# Altium PCB MB1296-STM32_LRA_Disco_revC01.PcbDoc (part 2 of 3)
Units mm, origin at the board's own origin, x right, y up, seen from the top; angles counter-clockwise.
Board outline 65.06 x 95.02 mm, 4 copper layers (Top Layer, GND, VCC, Bottom Layer), stack 1.037 mm thick; 180 components, 129 nets, 710 pads, 1005 vias.
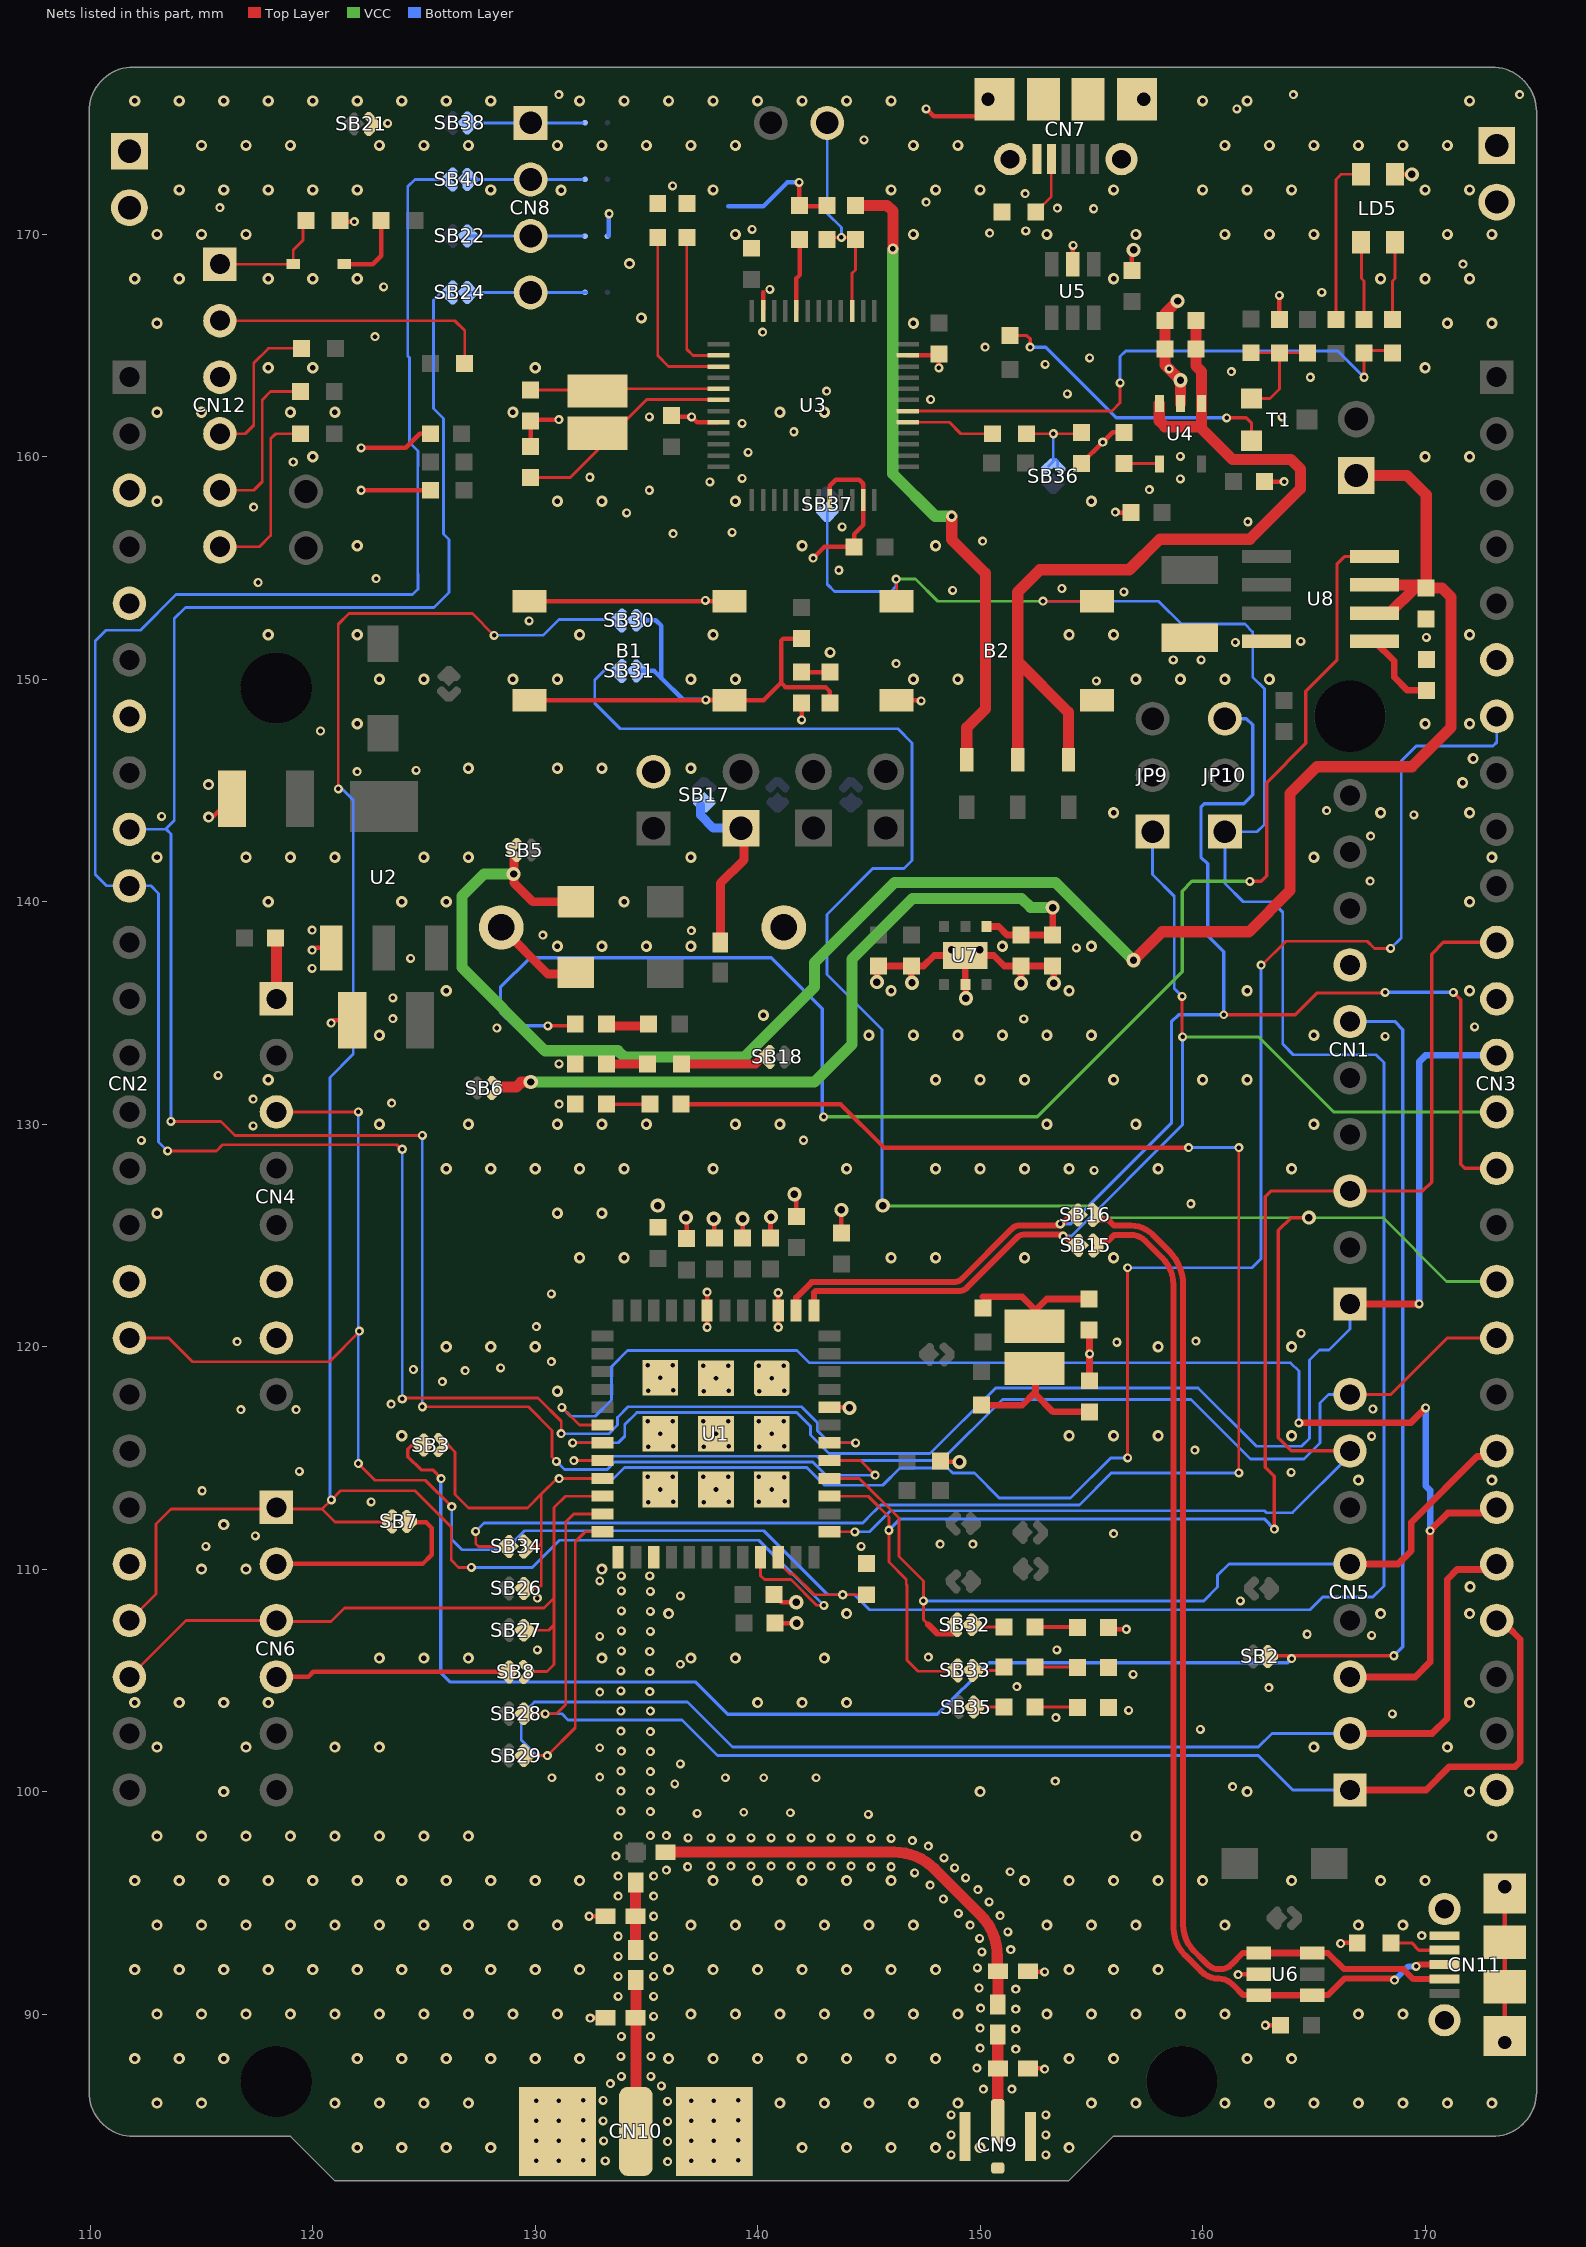
[diagram p4: the nets of this part, all layers, seen from the top]

## Via types
v1: diameter 0.406, hole 0.203, Top Layer to Bottom Layer, tented both sides, 496 vias
v2: diameter 0.5, hole 0.25, Top Layer to Bottom Layer, tented both sides, 413 vias
v3: diameter 0.635, hole 0.33, Top Layer to Bottom Layer, tented both sides, 53 vias
v4: diameter 0.4, hole 0.203, Top Layer to Bottom Layer, tented both sides, 43 vias

## Nets (pads, with @x,y where several pads share a name; then routed paths per layer and width w, separated by ;. In a path a pad name is that pad's centre, name@x,y a point inside that pad or via, vN(x,y) a via of type N, cw(c..) or ccw(c..) an arc to the next point about the centre after c; other vN are vias at no path point) (continued)
GND: B1.1 B1.4 B2.1 B2.4 BT1.2 C1.2 C2.2 C3.1 C4.1 C5.2 C6.2 C7.2 C8.1 C9.1 C10.1 C11.1 C17.1 C18.1 C19.1 C20.1 C21.2 C22.2 C23.2 C24.2 C25.1 C26.1 C27.1 C28.1 C29.1 C30.1 C31.1 C32.1 C33.1 C34.1 C35.1 C36.2 C37.2 C38.1 C39.1 C40.1 CN1.7 CN2.3 CN2.5 CN2.7 CN2.17 CN2.22 CN3.6 CN3.12 CN3.26 CN4.6 CN4.7 CN7.5 CN7.6 CN7.7 CN7.8 CN7.9 CN7.10 CN7.11 CN9.2 CN10.2 CN11.5 CN11.6 CN11.7 CN11.8 CN11.9 CN11.10 CN11.11 CN12.3 CN13.2 JP7.1 JP7.2 JP8.1 JP8.2 L1.1 L2.1 L3.1 L4.1 LD1.K LD2.K LD3.K LD4.K LD5.1 LD7.K R2.1 R6.2 R7.2 R9.1 R14.2 R16.2 R17.1 R18.2 R24.2 R27.1 R32.1 R36.1 SB21.1 SB23.2 U1.3 U1.7 U1.25 U1.27 U1.44 U1.49 U1.50 U1.51 U1.52 U1.53 U1.54 U1.55 U1.56 U1.57 U2.1 U3.8 U3.20 U3.23 U3.35 U3.47 U4.2 U5.2 U6.2 U7.0 U7.2 U8.4 | length 103.3
  Top Layer w0.203: v2@115.425,143.725 116.325,144.625 C37.2@116.376,144.625 ; v1@120.075,137.925 U2.1@120.838,137.925 ; v1@120.95,134.675 C36.2@121.776,134.675 ; R17.1@121.013,170.576 121.014,170.575 v1(121.875,170.575) ; v1(122.174,158.496) R27.1@125.285,158.496 ; v1(122.174,160.401) 124.178,160.401 124.813,161.036 C25.1@125.285,161.036 ; B1.4@129.739,153.508 B1.1@138.739,153.508 ; C22.2@129.794,160.464 C23.2@129.794,161.607 129.857,161.671 v1(131.064,161.671) ; CN10.2@131.725,84.825 CN10.2@131.725,86.44 ; v1@132.425,94.407 L3.1@133.166,94.407 ; v1@132.475,89.832 L4.1@133.166,89.832 ; C27.1@136.144,161.734 136.207,161.798 v1(137.033,161.798) 137.275,161.556 U3.8@138.244,161.556 ; C10.1@136.802,124.855 v3@136.802,125.773 ; v1@137.727,120.898 U1.7@137.727,121.631 v1@137.727,122.448 ; C11.1@138.052,124.88 v3@138.052,125.723 ; C9.1@139.327,124.88 v3@139.327,125.748 ; U3.47@140.244,166.556 140.244,167.405 ; C8.1@140.577,124.88 v3@140.577,125.802 ; C4.1@140.726,108.856 141.071,108.511 v3(141.732,108.511) ; C3.1@140.774,107.575 v3(141.75,107.575) ; v1(140.925,120.875) 140.927,120.877 U1.3@140.927,121.631 v1@140.927,122.423 ; C6.2@141.727,125.73 v3@141.727,126.773 ; v1(141.859,172.339) 141.859,171.26 R14.2@143.129,171.26 ; v1(141.975,148.175) R6.2@141.975,148.926 ; v1(142.494,155.448) 143.002,155.956 144.335,155.956 144.335,156.528 144.744,156.936 U3.23@144.744,158.056 144.744,158.786 144.564,158.966 143.51,158.966 143.244,158.7 U3.20@143.244,158.056 ; U1.44@143.227,117.281 v3@144.125,117.281 ; C5.2@143.76,125.109 v3(143.76,126.15) ; B2.1@146.249,149.063 v1@147.312,149.063 ; U3.35@146.744,164.556 C29.1@147.894,164.556 ; v1(147.574,175.641) 147.914,175.301 149.706,175.301 ; v1@148.15,163.95 C29.1@148.15,164.627 ; R2.1@148.227,114.856 148.258,114.825 v3(149.075,114.825) ; L2.1@152.141,87.557 v1@152.9,87.557 ; L1.1@152.141,91.932 152.141,91.9 v1(152.9,91.9) ; U5.2@154.164,168.651 v1@154.164,169.489 ; C24.2@154.559,159.702 v1(155.511,160.655) 155.956,161.1 C33.1@156.464,161.1 ; LD1.K@155.848,107.3 v1(156.575,107.3) ; v1(156.08,157.51) 156.1,157.49 C34.1@156.781,157.49 ; C35.1@156.825,168.374 v3@156.825,169.225 ; v1@161.544,175.596 v1(161.544,175.641) ; v1@161.625,91.8 U6.2@162.525,91.8 ; C31.1@162.789,158.88 v1(163.66,158.88) ; v1(162.825,89.5) C18.1@163.501,89.5 ; R36.1@163.449,166.179 v1(163.449,167.259) ; v1@166.125,93.225 166.15,93.2 R9.1@166.95,93.2 ; LD5.1@168.644,172.696 v3(169.406,172.696) ; CN11.7@173.575,88.725 CN11.8@173.575,91.225 CN11.9@173.575,93.225 CN11.10@173.575,95.725
  Top Layer w0.3: v3(145.36,136.385) C40.1@145.36,137.037 ; C40.1@145.435,137.112 C38.1@146.91,137.112 ; v3@146.91,136.385 C38.1@146.91,137.112 ; U7.2@149.335,136.285 U7.0@149.335,137.585 ; v3@149.36,135.785 U7.2@149.36,136.26 ; v3(151.835,136.335) C19.1@151.835,137.112 ; C39.1@153.26,137.112 C19.1@151.835,137.112 ; v3(153.31,136.335) C39.1@153.31,137.061 ; C1.2@154.892,120.748 154.917,120.723 C2.2@154.917,118.47 ; C38.1@146.91,137.112 147.461,137.112 147.935,137.585 U7.0@149.335,137.585 ; U7.0@149.335,137.585 150.61,137.585 151.083,137.112 C19.1@151.835,137.112
  Top Layer w0.508: v3(158.877,167.005) 158.305,166.433 C30.1@158.305,166.116 C32.1@158.305,164.846 158.305,164.137 v1(158.496,163.947) v3(159.004,163.439) U4.2@159.004,162.386
  Bottom Layer w0.203: CN10.2@131.731,84.779 CN10.2@131.731,86.394 ; SB23.2@133.299,169.926 v1@133.299,170.764 ; 138.684,171.26 140.26,171.26 141.339,172.339 v1(141.859,172.339) ; CN10.2@138.775,84.779 CN10.2@138.775,86.3
  other v1: 135.95,83.375 130.05,83.4 131.05,83.4 133.15,83.4 137.025,83.4 138.025,83.4 132.15,83.425 139.125,83.425 148.7,83.675 152.95,83.675 135.95,84.275 130.05,84.3 131.05,84.3 133.075,84.3 137.025,84.3 138.025,84.3 132.15,84.325 139.125,84.325 148.7,84.575 152.95,84.575 135.95,85.175 130.05,85.2 131.05,85.2 133.05,85.2 137.025,85.2 138.025,85.2 132.15,85.225 139.125,85.225 148.7,85.475 152.95,85.475 135.95,86.075 130.05,86.1 131.05,86.1 137.025,86.1 138.025,86.1 132.15,86.125 133.05,86.125 139.125,86.125 150.15,86.625 151.425,86.625 135.675,86.775 133.375,86.875 133.875,87.2 135.2,87.2 152.9,87.525 149.85,87.575 133.85,88.1 135.2,88.1 151.6,88.425 150,88.475 133.875,89 135.175,89 151.6,89.325 150,89.375 132.475,89.825 135.325,89.9 151.6,90.225 150.025,90.275 133.725,90.8 135.325,90.8 151.6,91.125 149.95,91.175 133.725,91.7 135.325,91.7 161.6,91.775 149.875,92.075 133.725,92.6 135.325,92.6 150.075,92.8 151.375,92.9 166.2,93.175 149.975,93.4 133.725,93.5 135.325,93.5 169.85,93.525 151.25,93.7 149.55,94 132.425,94.4 135.325,94.4 150.9,94.425 149.025,94.525 150.4,95.05 148.35,95.175 133.725,95.3 135.325,95.3 149.9,95.6 147.75,95.8 149.35,96.125 133.725,96.2 135.325,96.2 147.05,96.35 135.9,96.475 148.85,96.575 136.85,96.625 145.1,96.625 146,96.625 137.9,96.65 138.8,96.65 139.7,96.65 140.6,96.65 141.5,96.65 142.4,96.65 143.3,96.65 144.2,96.65 148.375,97.025 133.625,97.1 147.675,97.55 146.95,97.8 145.1,97.9 146,97.9 136.875,97.925 137.9,97.925 138.8,97.925 139.7,97.925 140.6,97.925 141.5,97.925 142.4,97.925 143.3,97.925 144.2,97.925 133.725,98 135.175,98.025 135.9,98.025 135.175,99.1 133.85,99.125 133.85,100.025 135.175,100.025 161.35,100.225 153.375,100.475 135.175,100.9 133.85,100.925 135.175,101.8 133.875,101.825 135.175,102.7 133.85,102.725 159.9,102.8 153.4,103.325 168.525,103.5 133.85,103.625 135.175,103.625 156.675,103.65 135.15,104.5 133.85,104.525 162.975,104.675 151.65,104.725 156.875,105.275 135.15,105.4 133.85,105.425 147.675,106.05 135.15,106.3 133.875,106.325 130.1,106.375 153.45,106.375 167.6,107.025 164.7,107.075 135.175,107.2 133.875,107.225 135.175,108.1 133.875,108.125 161.7,108.575 135.175,109 133.875,109.025 133.875,109.7 135.15,109.7 115.2,111.025 144.65,111.025 148.2,111.125 149.675,111.125 117.425,111.5 156,111.6 135.075,113 137.575,113 122.625,113.025 136.2,113.025 138.7,113.025 140.05,113.025 141.225,113.05 115.025,113.525 135.627,113.581 138.127,113.581 140.627,113.581 141.2,114.125 135.05,114.15 136.175,114.15 137.55,114.15 138.675,114.15 140.05,114.15 163.975,114.35 119.4,114.4 159.65,115.35 135.075,115.5 137.575,115.5 140.075,115.5 136.2,115.525 138.7,115.525 141.2,115.525 167.6,115.975 135.627,116.081 138.127,116.081 140.627,116.081 135.05,116.65 136.175,116.65 137.55,116.65 138.675,116.65 140.05,116.65 141.175,116.65 116.775,117.175 119.25,117.175 167.65,117.2 123.52,117.42 137.575,118 140.075,118 135.075,118.025 138.7,118.025 141.2,118.025 136.2,118.05 125.83,118.43 138.127,118.581 140.627,118.581 135.627,118.606 126.85,118.92 124.525,118.975 128.45,119.05 137.55,119.15 138.675,119.15 140.05,119.15 141.175,119.15 135.05,119.175 136.175,119.175 130.725,119.325 154.92,119.68 156.15,120.2 116.6,120.225 159.7,120.25 164.425,120.6 137.725,120.875 130.05,120.9 130.725,122.375 140.925,122.425 137.725,122.45 159.475,126.425 155.125,127.925 112.3,129.275 142.06,129.28 117.325,129.925 131.075,130.9 123.55,130.95 117.325,131.125 115.75,132.2 131.07,132.71 168.2,133.95 128.275,134.325 172.225,134.375 120.825,134.55 123.6,134.75 151.96,134.735 123.6,135.675 119.975,137 124.4,137.45 119.975,137.825 154.33,137.93 130.35,138.5 137.025,138.7 119.975,138.725 167.525,140.925 167.55,142.95 113.21,143.84 169.5,143.9 165.575,144.1 122,145.85 124.65,145.9 120.35,147.675 147.35,149.025 155.225,149.925 146.225,150.7 158.68,150.87 159.93,150.87 161.47,151.66 164.41,151.7 170.06,151.88 129.725,152.625 137.65,153.55 156.464,153.924 148.76,154 153.67,154.08 117.55,154.35 122.85,154.525 143.65,154.9 150.114,156.21 136.2,156.55 138.85,156.6 143.8,156.85 162.03,157.08 134.112,157.48 117.348,157.734 135.128,158.496 157.61,158.52 137.851,158.874 159.004,159.004 139.3,159.025 132.46,159.08 119.126,159.766 159.004,160.02 139.575,160.2 141.625,161.125 139.3,161.5 135.128,161.798 163.576,161.798 147.775,162.575 153.925,162.825 143.1,162.95 164.846,163.576 161.29,163.83 148.15,164 152.925,164.15 154.925,164.45 150.225,164.925 122.8,165.4 140.225,165.6 165.354,167.386 140.55,167.525 123.19,167.64 171.704,168.656 154.175,169.5 150.425,170.05 152.05,170.15 139.75,170.225 133.325,170.925 155.1,171.15 153.475,171.175 115.824,171.196 147.574,171.45 152.019,171.831 136.175,172.175 144.78,174.244 123.37,174.99 131.064,176.276 164.084,176.276 174.244,176.276
  other v2: 122,84 124,84 126,84 128,84 142,84 144,84 146,84 148,84 150,84 154,84 113,86 115,86 121,86 123,86 125,86 127,86 141,86 143,86 145,86 147,86 149,86 155,86 157,86 161,86 163,86 165,86 167,86 169,86 171,86 173,86 112,88 114,88 116,88 122,88 124,88 126,88 128,88 130,88 132,88 136,88 138,88 140,88 142,88 144,88 146,88 148,88 154,88 156,88 162,88 164,88 113,90 115,90 117,90 119,90 121,90 123,90 125,90 127,90 129,90 131,90 137,90 139,90 141,90 143,90 145,90 147,90 149,90 153,90 155,90 157,90 159,90 161,90 167,90 169,90 112,92 114,92 116,92 118,92 120,92 122,92 124,92 126,92 128,92 130,92 132,92 136,92 138,92 140,92 142,92 144,92 146,92 148,92 154,92 156,92 158,92 113,94 115,94 117,94 119,94 121,94 123,94 125,94 127,94 129,94 131,94 137,94 139,94 141,94 143,94 145,94 147,94 153,94 155,94 157,94 161,94 167,94 169,94 112,96 114,96 116,96 118,96 120,96 122,96 124,96 126,96 128,96 130,96 132,96 138,96 140,96 142,96 144,96 146,96 152,96 154,96 156,96 158,96 160,96 164,96 168,96 170,96 113,98 115,98 117,98 119,98 121,98 123,98 125,98 127,98 157,98 173,98 116,100 150,100 162,100 172,100 113,102 117,102 121,102 123,102 165,102 171,102 112,104 114,104 116,104 118,104 140,104 142,104 144,104 172,104 123,106 125,106 127,106 133,106 137,106 139,106 143,106 136,108 144,108 168,108 172,108 172.02,109.21 115,110 117,110 133,110 116,112 167,114 173,114 124,116 154,116 156,116 158,116 164,116 131,118 126,120 128,120 130,120 158,120 164,120 132,124 134,124 146,124 148,124 152,124 156,124 113,126 131,126 133,126 126,128 128,128 130,128 132,128 134,128 138,128 144,128 148,128 150,128 152,128 154,128 158,128 164,128 123,130 127,130 131,130 133,130 135,130 139,130 141,130 153,130 157,130 165,130 118,132 148,132 150,132 152,132 156,132 160,132 162,132 123,134 145,134 147,134 149,134 151,134 153,134 155,134 165,134 140.26,134.9 126,136 146,136 154,136 162,136 172,136 131,138 133,138 135,138 137,138 151,138 155,138 118,140 124,140 126,140 134,140 172,140 113,142 117,142 119,142 121,142 125,142 127,142 137,142 165,142 173,142 115.324,143.803 156,144 168,144 172,144 115.316,145.263 171.688,145.35 127,146 131,146 133,146 137,146 172.161,146.431 122,148 170,148 172,148 123,150 125,150 129,150 131,150 137,150 139,150 147,150 149,150 157,150 159,150 161,150 163,150 143.256,151.206 118,152 122,152 132,152 138,152 154,152 156,152 172,152 122,156 142,156 148,156 113,158 131,158 133,158 139,158 155,158 120,160 170,160 172,160 113,162 115,162 119,162 121,162 129,162 141,162 143,162 118,164 120,164 130,164 170,164 113,166 147,166 171,166 173,166 134.772,166.243 112,168 114,168 118,168 120,168 122,168 156,168 168,168 170,168 172,168 134.239,168.681 113,170 115,170 117,170 139,170 147,170 153,170 157,170 161,170 163,170 165,170 171,170 173,170 131.166,171.983 114,172 116,172 118,172 120,172 122,172 128,172 138,172 146,172 148,172 150,172 156,172 160,172 162,172 164,172 170,172 172,172 115,174 117,174 119,174 123,174 125,174 127,174 131,174 133,174 135,174 137,174 139,174 147,174 149,174 161,174 163,174 165,174 167,174 169,174 171,174 112,176 114,176 116,176 118,176 120,176 122,176 124,176 126,176 128,176 132,176 134,176 136,176 138,176 140,176 142,176 144,176 146,176 160,176 162,176 172,176
  other v3: 144.125,117.25 138.025,125.75 139.325,125.75 136.775,125.8 140.6,125.825 135.51,126.34 141.65,126.85 149.36,135.66 146.935,136.36 148.71,137.835 149.985,137.835 156.9,169.3
  other v4: 151.35,96.4 144.975,98.975 137.275,99.025 141.475,99.05 139.375,99.075 136.275,100.35 130.75,100.625 138.55,100.625 140.275,100.625 142.625,100.625 132.9,100.65 136.525,101.25 132.9,101.975 132.9,104.475 136.525,105.725 132.9,106.975 130.1,108.7 136.525,108.8 132.9,109.475
LED_STLINK: R29.2 R30.2 U3.30 | length 25.8
  Top Layer w0.127: U3.30@146.744,162.056 155.919,162.056 156.289,162.426 v1(156.289,163.326) ; v1(167.259,163.576) 167.259,164.782 R29.2@168.529,164.782
  Bottom Layer w0.127: v1(156.289,163.326) 156.289,164.501 156.546,164.758 166.077,164.758 v1(167.259,163.576)
LRA_USB_N: CN11.2 SB16.1 U6.1 U6.6 | length 47.8
  Top Layer w0.27: SB16.1@155.182,125.722 155.733,125.722 156.008,125.446 156.775,125.446 cw(c156.775,124.082) 157.739,125.047 158.493,124.293 cw(c156.967,122.767) 159.125,122.767 159.125,94.014 ccw(c160.789,94.014) 159.612,92.838 ; 159.613,92.838 160.215,92.235 ccw(c160.725,92.744) 160.725,92.024 ; 160.802,92.024 ccw(c160.802,92.698) 161.279,92.221 161.808,92.75 U6.1@162.525,92.75 ; U6.6@164.925,92.75 165.633,92.75 166.36,92.024 169.026,92.024 169.475,91.575 CN11.2@170.875,91.575
  Top Layer w0.3: U6.1@162.525,92.75 U6.6@164.925,92.75
LRA_USB_P: CN11.3 SB15.1 U6.3 U6.4 | length 48
  Top Layer w0.27: SB15.1@155.207,124.753 155.758,124.753 156.033,125.029 156.775,125.029 cw(c156.775,124.133) 157.408,124.767 ; 157.408,124.767 158.188,123.987 cw(c156.967,122.767) 158.693,122.767 158.693,93.878 ccw(c160.409,93.878) 159.195,92.666 ; 159.196,92.665 159.937,91.923 ccw(c160.738,92.724) 160.738,91.592 cw(c160.738,90.738) 161.342,91.342 161.833,90.85 U6.3@162.525,90.85 ; U6.4@164.925,90.85 165.633,90.85 166.375,91.592 v1@168.625,91.592 ; v1(169.6,92.15) 169.675,92.225 CN11.3@170.875,92.225
  Top Layer w0.3: U6.3@162.525,90.85 U6.4@164.925,90.85
  Bottom Layer w0.27: v1(168.625,91.525) 169.25,92.15 v1(169.6,92.15)
MCU_NRST: B2.2 B2.3 C17.2 CN2.18 CN4.3 JP10.1 SB37.2 U1.34 | length 164.5
  Top Layer w0.127: CN2.18@111.76,120.396 113.529,120.396 114.6,119.325 120.75,119.325 v1@122.125,120.7 ; CN4.3@118.364,130.556 122.044,130.556 v1(122.05,130.55) ; v1@122,114.8 v1(122.05,114.75) 122.8,114 125.06,114 v1(126.25,112.81) ; U1.34@140.927,110.312 141.454,109.785 141.607,109.785 142.542,108.85 v1(143.825,108.85) C17.2@144.899,108.85 ; B2.2@146.249,153.508 v1@146.249,154.476 ; v1(152.825,153.508) B2.3@155.249,153.508 ; B2.3@155.066,153.325 B2.3@155.227,153.486
  VCC w0.127: v1(146.225,154.5) 147.1,154.5 148.092,153.508 v1(152.825,153.508)
  Bottom Layer w0.127: v1(122.05,114.75) v1(122.05,130.55) ; v1(126.25,112.81) 126.25,111.34 126.715,110.875 128.675,110.875 129.525,111.725 140.275,111.725 143.15,108.85 v1(143.825,108.85) 144.35,108.85 145.025,108.175 164.825,108.175 165.4,108.75 167.65,108.75 168.15,109.25 168.15,132.775 167.8,133.125 164.075,133.125 163.6,133.6 163.6,139.525 163.125,140 161.825,140 161,140.825 JP10.1@161,143.15 162.455,143.15 162.775,143.47 162.775,149.575 162.25,150.1 162.25,152.13 161.9,152.48 159.05,152.48 158.022,153.508 v1(152.825,153.508) ; SB37.2@143.129,157.531 143.129,154.271 143.45,153.95 145.991,153.95 146.225,154.184 v1(146.225,154.5)
  other v1: 122.1,120.7
NetB1_2: B1.2 B1.3 C16.2 R5.1 SB30.2 SB31.2 | length 25.7
  Top Layer w0.203: B1.3@129.739,149.063 B1.2@138.739,149.063 ; v1(137.675,149.075) 138.727,149.075 B1.2@138.739,149.063 ; R5.1@141.975,151.827 141.152,151.827 141.05,151.725 141.05,149.85 ; C16.2@143.25,148.926 143.25,149.45 143.05,149.65 141.25,149.65 141.05,149.85 ; B1.2@138.739,149.063 140.263,149.063 141.05,149.85
  Bottom Layer w0.203: SB31.2@134.555,150.375 135.35,150.375 135.675,150.05 ; SB30.2@134.555,152.65 135.425,152.65 135.675,152.4 135.675,150.05 ; v1(137.675,149.075) 136.65,149.075 135.675,150.05
NetBT1_1: BT1.1 D5.1 | length 4.2
  Top Layer w0.4: BT1.1@128.475,138.85 130.575,136.75 D5.1@131.825,136.75
NetC1_1: C1.1 R4.1 X1.1 | length 6.2
  Top Layer w0.3: 150.117,122.246 151.884,122.246 X1.1@152.49,121.64 ; X1.1@152.49,120.69 X1.1@152.49,121.64 ; C1.1@154.892,122.145 152.995,122.145 X1.1@152.49,121.64
NetC2_1: C2.1 R3.1 X1.2 | length 6.6
  Top Layer w0.3: R3.1@150.07,117.37 151.895,117.37 152.49,117.965 ; X1.2@152.45,119.02 152.49,118.98 152.49,117.965 ; C2.1@154.917,117.073 153.282,117.073 152.49,117.865 152.49,117.965
NetC12_1: C12.1 C13.1 L1.2 | length 19.6
  Top Layer w0.5: C13.1@135.866,97.282 146.139,97.282 cw(c146.139,94.742) 147.935,96.538 150.022,94.451 cw(c148.226,92.655) 150.766,92.655 ; C12.1@150.795,90.562 L1.2@150.795,91.932
  Top Layer w0.508: C12.1@150.741,90.432 ccw(c150.611,90.562) C12.1@150.795,90.562 ; L1.2@150.766,91.832 150.766,92.655
NetC12_2: C12.2 CN9.1 L2.2 | length 3.1
  Top Layer w0.5: CN9.1@150.791,86.007 C12.2@150.791,89.086
NetC14_2: C14.2 C15.1 L3.2 | length 4
  Top Layer w0.5: 134.516,93.475 L3.2@134.516,94.407
  Top Layer w0.508: C14.2@134.512,95.911 L3.2@134.512,94.407 134.512,92.882 C15.1@134.516,92.882
NetC15_2: C15.2 CN10.1 L4.2 | length 6.8
  Top Layer w0.5: CN10.1@134.525,84.875 C15.2@134.525,91.632
  Top Layer w0.508: C15.2@134.516,91.536 C15.2@134.525,91.536
NetC16_1: C16.1 R6.1 | length 1.3
  Top Layer w0.203: R6.1@141.975,150.323 C16.1@143.25,150.323
NetC19_2: C19.2 C39.2 SB6.1 U7.4 | length 35.2
  Top Layer w0.3: U7.4@150.285,138.885 150.835,138.885 151.212,138.509 C19.2@151.835,138.509 C39.2@153.26,138.509 v3(153.26,139.735)
  Top Layer w0.5: SB6.1@128.345,131.675 129.15,131.675 129.375,131.9 v3(129.8,131.9)
  VCC w0.5: v3(129.8,131.9) 142.56,131.9 144.24,133.58 144.24,137.42 146.97,140.15 151.86,140.15 152.275,139.735 v3(153.26,139.735)
NetC20_2: C20.2 D7.1 JP5.1 SB5.1 U8.6 U8.7 | length 87.4
  Top Layer w0.4: SB5.1@129.043,142.122 129.043,140.857 129.9,140 D7.1@131.825,140
  Top Layer w0.5: v3(156.89,137.37) 158.17,138.65 162.075,138.65 163.925,140.5 163.925,144.86 165.135,146.07 169.41,146.07 171.17,147.83 171.17,153.7 170.761,154.109 C20.2@170.05,154.109 ; JP5.1@167.005,159.156 169.189,159.156 170.05,158.296 C20.2@170.05,154.109 ; U8.7@167.725,154.245 169.914,154.245 C20.2@170.05,154.109 ; U8.6@168.408,152.975 169.542,154.109
  VCC w0.5: v3(129.03,141.25) 127.71,141.25 126.71,140.25 126.71,137.04 130.45,133.3 133.73,133.3 134.01,133.02 139.41,133.02 142.552,136.162 142.552,137.262 146.155,140.865 153.395,140.865 v3(156.89,137.37)
NetC24_1: C24.1 R25.1 SB36.1 | length 4.3
  Top Layer w0.127: R25.1@152.082,161.036 v1(153.289,161.036) C24.1@154.495,161.036
  Bottom Layer w0.127: SB36.1@153.086,159.588 153.289,159.791 v1(153.289,161.036) ; SB36.1@153.387,159.89 153.492,159.785 SB36.1@153.492,159.588
NetC30_2: C30.2 C32.2 D3.2 D8.2 U4.1 U4.3 | length 41.3
  Top Layer w0.508: D8.2@151.689,146.387 151.689,150.8 ; D3.2@153.975,146.387 153.975,148.514 151.689,150.8 ; U4.3@158.054,162.386 158.054,161.605 158.303,161.356 159.954,161.356 ; C30.2@159.702,166.116 C32.2@159.702,164.846 159.702,164.084 159.954,163.832 U4.1@159.954,162.386 159.954,161.356 ; 151.689,150.8 151.689,153.924 152.685,154.92 156.7,154.92 158.08,156.3 162.13,156.3 164.4,158.57 164.4,159.45 163.975,159.875 161.35,159.875 159.954,161.271 159.954,161.356
NetC33_2: C33.2 U4.4 | length 1.6
  Top Layer w0.127: C33.2@156.464,159.702 U4.4@158.037,159.702
NetCN4_1: CN4.1 R15.2 | length 2.7
  Top Layer w0.5: CN4.1@118.364,135.636 R15.2@118.364,138.334
NetCN7_4: CN7.4 R32.2 | length 2.7
  Top Layer w0.127: R32.2@152.499,171 153.2,171.701 CN7.4@153.2,173.375
NetCN8_1: CN8.1 SB38.2 SB39.1 | length 4.9
  Bottom Layer w0.127: SB38.2@127.254,175.006 CN8.1@129.794,175.006 132.112,175.006
NetCN8_2: CN8.2 SB40.2 SB41.1 | length 5.2
  Bottom Layer w0.127: SB40.2@126.949,172.466 CN8.2@129.794,172.466 132.112,172.466
NetCN8_3: CN8.3 SB22.2 SB23.1 | length 5.2
  Bottom Layer w0.127: SB22.2@126.949,169.926 CN8.3@129.794,169.926 132.112,169.926
NetCN8_4: CN8.4 SB24.2 SB25.1 | length 5.4
  Bottom Layer w0.127: SB24.2@126.949,167.386 CN8.4@129.794,167.386 SB25.1@132.309,167.386
NetCN11_4: CN11.4 R9.2 | length 2.5
  Top Layer w0.15: R9.2@168.474,93.2 169.4,93.2 169.725,92.875 CN11.4@170.875,92.875
NetCN12_1: CN12.1 D1.1 R17.2 | length 5.3
  Top Layer w0.127: CN12.1@115.824,168.656 D1.1@118.999,168.656 ; D1.1@119.126,168.656 119.126,169.291 119.57,169.736 R17.2@119.57,170.561
NetCN12_2: CN12.2 R20.2 | length 12.7
  Top Layer w0.127: CN12.2@115.824,166.116 126.384,166.116 126.838,165.662 R20.2@126.838,164.201
NetCN12_4: CN12.4 R21.2 | length 6.9
  Top Layer w0.127: CN12.4@115.824,161.036 116.967,161.036 117.348,161.417 117.348,164.211 117.983,164.846 ; 118.012,164.875 R21.2@119.501,164.875
NetCN12_5: CN12.5 R22.2 | length 7.6
  Top Layer w0.127: CN12.5@115.824,158.496 117.348,158.496 117.729,158.877 117.729,162.56 118.11,162.941 R22.2@119.444,162.941
NetCN12_6: CN12.6 R23.2 | length 8.3
  Top Layer w0.127: CN12.6@115.824,155.956 117.602,155.956 118.11,156.464 118.11,160.81 118.336,161.036 R23.2@119.444,161.036
NetD1_2: D1.2 R19.2 | length 3.4
  Top Layer w0.203: D1.2@121.412,168.656 122.7,168.656 123.077,169.032 R19.2@123.077,170.6
NetD2_2: D2.2 R13.1 | length 28.9
  Top Layer w0.5: R13.1@144.4,171.3 145.819,171.3 146.075,171.044 v2(146.075,169.342)
  Top Layer w0.508: v2(148.717,157.328) 148.717,156.286 150.241,154.762 150.241,148.666 149.403,147.828 D2.2@149.403,146.387
  VCC w0.508: v2(146.075,169.342) 146.075,159.233 147.98,157.328 v2(148.717,157.328)
NetJP1_1: JP1.1 L5.1 SB17.2 | length 8.1
  Top Layer w0.4: L5.1@138.325,138.175 138.325,140.825 139.392,141.892 JP1.1@139.392,143.307
  Bottom Layer w0.4: SB17.2@137.422,144.343 137.422,143.901 138.013,143.31 JP1.1@139.22,143.31
NetJP4_2: JP4.2 R13.2 R14.1 U3.39 | length 10
  Top Layer w0.127: R14.1@143.129,169.862 v1(143.764,169.862) 144.399,169.862 144.399,168.402 144.244,168.247 U3.39@144.244,166.556
  Bottom Layer w0.127: JP4.2@143.129,175.006 143.129,170.942 143.764,170.307 v1(143.764,169.862)
NetLD1_A: LD1.A R11.2 | length 2
  Top Layer w0.127: R11.2@152.473,107.3 R11.2@152.599,107.3
  Top Layer w0.2: R11.2@152.599,107.4 154.351,107.4 LD1.A@154.451,107.3
NetLD2_A: LD2.A R8.2 | length 2
  Top Layer w0.15: LD2.A@133.198,130.9 R8.2@135.152,130.9
NetLD3_A: LD3.A R10.2 | length 1.7
  Top Layer w0.127: R10.2@152.599,105.6 LD3.A@154.301,105.6
NetLD4_A: LD4.A R12.2 | length 1.9
  Top Layer w0.127: R12.2@152.599,103.8 LD4.A@154.501,103.8
NetLD5_2: LD5.2 R29.1 | length 3.6
  Top Layer w0.127: R29.1@168.529,166.179 168.529,167.894 168.644,168.009 LD5.2@168.644,169.696
NetLD5_3: LD5.3 R30.1 | length 3.6
  Top Layer w0.127: LD5.3@167.144,169.696 167.144,168.009 167.259,167.894 R30.1@167.259,166.179
NetLD5_4: LD5.4 R31.1 | length 7.5
  Top Layer w0.127: R31.1@165.989,166.179 165.989,172.466 166.219,172.696 LD5.4@167.144,172.696
NetLD6_A: LD6.A R39.1 | length 1.7
  Top Layer w0.4: LD6.A@133.313,134.415 R39.1@135.062,134.415
NetLD6_K: LD6.K U8.8 | length 69.3
  Top Layer w0.15: v4(130.57,134.42) LD6.K@131.911,134.42 ; v1(162.128,140.919) 162.636,140.919 162.88,141.163 162.88,145.355 164.64,147.115 164.64,149.46 166.04,150.86 166.04,155.18 166.375,155.515 U8.8@167.725,155.515
  VCC w0.15: v4(142.96,130.33) 152.56,130.33 159.08,136.85 159.08,140.48 159.519,140.919 v1(162.128,140.919)
  Bottom Layer w0.15: v4(130.57,134.42) 129.06,134.42 128.44,135.04 128.44,136.16 129.77,137.49 140.61,137.49 142.9,135.2 v4@142.9,130.39
NetLD7_A: LD7.A R37.1 | length 1.7
  Top Layer w0.4: LD7.A@133.318,132.71 R37.1@135.055,132.71
NetR7_1: R7.1 U3.2 | length 6.6
  Top Layer w0.127: R7.1@136.814,169.853 136.814,164.836 137.094,164.556 U3.2@138.244,164.556
NetR8_1: R8.1 SB34.2 | length 78
  Top Layer w0.127: v1(127.325,111.7) 127.325,111.15 127.455,111.02 SB34.2@128.82,111.02 ; v1(161.625,114.325) v1(161.625,128.95)
  Top Layer w0.2: R8.1@136.549,130.9 143.725,130.9 145.675,128.95 v1(159.375,128.95)
  Bottom Layer w0.127: v1(127.325,111.7) 127.7,112.075 144.725,112.075 144.915,112.264 144.915,112.275 145.53,112.89 154.458,112.89 155.893,114.325 v1(161.625,114.325) ; v1(159.375,128.95) v1(161.625,128.95)
NetR10_1: R10.1 SB33.2 | length 1.8
  Top Layer w0.127: SB33.2@149.535,105.125 SB33.2@149.78,105.125 ; SB33.2@149.655,105.45 150.927,105.45 R10.1@151.076,105.6 ; SB33.2@149.78,105.275 SB33.2@149.805,105.25
NetR11_1: R11.1 SB32.2 | length 1.6
  Top Layer w0.127: SB32.2@149.63,107.5 149.73,107.4 R11.1@151.202,107.4
NetR12_1: R12.1 SB35.2 | length 1.4
  Top Layer w0.127: SB35.2@149.705,103.8 R12.1@151.076,103.8
NetR16_1: R16.1 U3.44 | length 3.4
  Top Layer w0.2: U3.44@141.744,166.556 141.744,168.019 141.9,168.175 141.9,169.817 R16.1@141.864,169.853
NetR18_1: R18.1 U3.3 | length 8.3
  Top Layer w0.127: R18.1@135.509,169.862 135.509,164.547 136,164.056 U3.3@138.244,164.056
NetR24_1: R24.1 U8.5 | length 3.7
  Top Layer w0.3: U8.5@167.725,151.705 168.62,150.81 168.62,150.09 169.209,149.501 R24.1@170.12,149.501
NetR25_2: R25.2 U3.29 | length 4.2
  Top Layer w0.127: U3.29@146.744,161.556 148.609,161.556 149.129,161.036 R25.2@150.685,161.036
NetR33_1: R33.1 T1.2 | length 13.5
  Top Layer w0.15: R33.1@151.339,165.451 152.099,165.451 152.25,165.3 v1(152.25,164.925) ; v1(161.075,161.75) 161.95,161.75 162.199,161.501 T1.2@162.199,160.721
  Bottom Layer w0.15: v1(152.25,164.925) 152.95,164.925 156.125,161.75 v1(161.075,161.75)
NetR34_2: R34.2 R35.2 R36.2 T1.1 | length 5.6
  Top Layer w0.127: R35.2@162.175,164.676 164.698,164.676 R34.2@164.719,164.655 ; T1.1@162.199,162.621 163.03,162.621 163.449,163.04 R36.2@163.449,164.655
NetR37_2: R37.2 SB18.1 | length 4
  Top Layer w0.4: R37.2@136.584,132.715 139.905,132.715 SB18.1@140.418,133.228
OSC_IN: C23.1 U3.5 X2.2 | length 8.5
  Top Layer w0.127: C23.1@129.794,163.005 132.766,163.005 X2.2@132.81,162.96 132.906,163.056 U3.5@138.244,163.056
OSC_OUT: C22.1 U3.6 X2.1 | length 10.4
  Top Layer w0.127: C22.1@129.794,159.067 130.561,159.067 130.818,159.067 131.577,159.067 132.81,160.3 X2.1@132.81,161.06 ; X2.1@132.974,160.533 135.014,162.573 138.227,162.573 U3.6@138.244,162.556
PA0: CN2.23 CN6.1 SB7.1 SB30.1 U1.33 | length 100.6
  Top Layer w0.127: CN2.23@111.76,107.696 112.95,108.886 112.95,112.025 113.625,112.7 CN6.1@118.201,112.7 ; CN6.1@118.364,112.7 120.425,112.7 ; v1(121.15,145.075) 121.15,152.475 121.625,152.95 127.175,152.95 v1(128.15,151.975) ; SB7.1@123.443,112.353 123.215,112.125 121,112.125 120.425,112.7 ; v1(127.13,110.08) 126.56,110.08 126.23,110.41 126.23,111.895 124.6,113.525 121.25,113.525 v1(120.838,113.113) 120.425,112.7 ; U1.33@140.127,110.531 140.127,109.706 140.302,109.531 141.502,109.531 142.658,108.375 v1(142.975,108.375)
  Bottom Layer w0.127: v1@120.775,113.175 120.775,132.1 121.825,133.15 121.825,144.575 121.325,145.075 v1(121.15,145.075) ; v1(127.13,110.08) 129.87,110.08 131.09,111.3 140.05,111.3 v1(142.975,108.375) ; v1(128.15,151.975) 130.35,151.975 131.065,152.69 133.525,152.69 SB30.1@133.768,152.447
"PA0 ALIAS": CN6.2 SB7.2 | length 9.5
  Top Layer w0.2: CN6.2@118.364,110.236 124.936,110.236 125.35,110.65 125.35,111.85 125.1,112.1 SB7.2@124.28,112.1
PA2: CN3.22 CN5.2 SB29.2 U1.24 | length 66.6
  Top Layer w0.127: SB29.2@129.487,101.622 v1(130.547,101.622) 131.8,102.875 131.8,111.231 132.25,111.681 U1.24@133.027,111.681
  Top Layer w0.3: CN5.2@166.624,102.616 170.316,102.616 171,103.3 171,109.55 171.435,109.985 CN3.22@172.725,109.985
  Bottom Layer w0.127: v1(130.547,101.622) 130.078,101.622 129.375,102.325 129.375,103.439 129.961,104.025 136.85,104.025 138.875,102 162.5,102 163.116,102.616 CN5.2@166.624,102.616
PA3: CN3.23 CN5.1 SB28.2 U1.23 | length 65.1
  Top Layer w0.127: SB28.2@129.487,103.5 v1(130.45,103.5) 130.95,103.5 131.375,103.925 131.375,112.125 131.731,112.481 U1.23@133.027,112.481
  Top Layer w0.3: CN5.1@166.624,100.076 170.051,100.076 171.1,101.125 174.05,101.125 174.275,101.35 174.275,106.85 173.68,107.445 CN3.23@172.725,107.445
  Bottom Layer w0.127: v1(130.45,103.5) 131.2,103.5 131.475,103.225 136.6,103.225 138.2,101.625 162.5,101.625 164.049,100.076 CN5.1@166.624,100.076
PA4: CN2.24 CN6.3 SB8.1 SB27.2 U1.22 | length 33
  Top Layer w0.127: CN2.24@111.76,105.156 114.3,107.696 CN6.3@118.364,107.696 118.406,107.654 120.829,107.654 121.425,108.25 130.4,108.25 130.85,108.7 ; SB27.2@129.487,107.257 130.607,107.257 130.85,107.5 ; SB8.1@129.607,105.588 129.8,105.395 130.525,105.395 130.85,105.72 130.85,107.5 ; U1.22@133.027,113.281 131.356,113.281 130.85,112.775 130.85,108.7 ; 130.85,107.5 130.85,108.7
"PA4 ALIAS": CN6.4 SB8.2 | length 10.6
  Top Layer w0.127: SB8.2@128.693,105.385 SB8.2@128.82,105.385
  Top Layer w0.2: CN6.4@118.364,105.156 119.8,105.156 120.029,105.385 128.515,105.385 SB8.2@128.693,105.563
PA5: CN3.7 SB3.1 SB26.2 SB34.1 U1.21 | length 92.5
  Top Layer w0.127: SB3.1@125.97,115.57 126.1,115.57 126.4,115.27 126.4,113.36 127.01,112.75 129.65,112.75 130.275,113.375 ; SB34.1@129.607,111.223 SB34.1@129.607,110.817 129.816,111.025 130.15,111.025 130.275,111.15 ; SB26.2@129.614,109.313 129.777,109.15 130.15,109.15 130.275,109.275 130.275,111.15 ; U1.21@133.027,114.081 130.981,114.081 130.275,113.375 ; v4(156.625,115) v4(156.625,123.55) ; v4(162.625,137.15) 162.675,137.15 163.75,138.225 167.4,138.225 167.725,137.9 v4(168.45,137.9) ; 130.275,111.15 130.275,113.375
  Bottom Layer w0.127: v4(131.075,114.075) 133.525,114.075 134.017,114.567 142.208,114.567 143,113.775 145.622,113.775 146.397,114.55 148.533,114.55 148.766,114.317 149.743,114.317 150.862,113.198 154.068,113.198 155.87,115 v4(156.625,115) ; v4(156.625,123.55) 162.225,123.55 162.625,123.95 v4(162.625,137.15) ; v4(168.45,137.9) 168.925,138.375 168.925,146.325 169.6,147 173.05,147 173.22,147.17 CN3.7@173.22,148.336
PA5/PB13: CN1.6 SB2.2 SB3.2 | length 88.4
  Top Layer w0.15: SB3.2@124.99,115.58 124.46,115.58 124.27,115.39 124.27,115.06 124.87,114.46 125.39,114.46 v1(125.775,114.075) ; SB2.2@162.93,106.075 162.963,106.108 v1(168.592,106.108) v1@168.625,106.075
  Bottom Layer w0.15: v1(125.775,114.075) 125.75,114.05 125.75,105.35 126.17,104.93 137.195,104.93 138.65,103.475 148.075,103.475 150.4,105.8 163.825,105.8 v1(164,105.975) ; CN1.6@166.624,134.62 168.63,134.62 169,134.25 169,106.516 v1(168.592,106.108)
PA8: CN3.18 CN5.8 U1.20 | length 47.8
  Top Layer w0.127: v1(131.744,114.881) U1.20@133.027,114.881 ; CN5.8@166.85,117.856 168.456,117.856 170.996,120.396 CN3.18@172.725,120.396
  Bottom Layer w0.127: v1(131.744,114.881) 132.65,114.881 132.844,115.075 142.675,115.075 142.869,114.881 148.252,114.881 151.001,117.63 159.47,117.63 162.15,114.95 164.55,114.95 165.275,115.675 165.275,117.475 165.656,117.856 CN5.8@166.624,117.856
PA9: CN1.1 CN3.13 U1.19 | length 62.9
  Top Layer w0.127: v1(131.681,115.681) U1.19@133.027,115.681
  Top Layer w0.3: CN1.1@166.624,121.92 v4(169.73,121.92)
  Bottom Layer w0.127: v1(131.681,115.681) 133.731,115.681 134.025,115.975 134.025,116.5 134.569,117.044 141.756,117.044 142.375,116.425 142.375,116.025 143.2,115.2 147.75,115.2 150.7,118.15 159.8,118.15 162.425,115.525 164.45,115.525 164.8,115.875 164.8,119.4 165.25,119.85 165.675,119.85 166.624,120.799 CN1.1@166.624,121.92
  Bottom Layer w0.3: v4(169.73,121.92) 169.73,132.805 170.021,133.096 CN3.13@172.725,133.096
PA10: CN3.21 CN5.3 U1.18 | length 64.4
  Top Layer w0.127: v1(131.2,117.275) 131.994,116.481 U1.18@133.027,116.481
  Top Layer w0.3: v1@164.362,116.575 169.35,116.575 v4(170.025,117.25) ; CN5.3@166.624,105.156 169.556,105.156 170.225,105.825 v4(170.225,111.725) 171.025,112.525 CN3.21@172.725,112.525
  Bottom Layer w0.127: v1(131.2,117.275) 131.6,116.875 132.7,116.875 133.425,117.6 133.425,119.1 134.15,119.825 141.775,119.825 142.325,119.275 163.95,119.275 164.325,118.9 v1@164.325,116.612
  Bottom Layer w0.3: v4(170.025,117.25) 170.025,113.75 170.225,113.55 v4(170.225,111.725)
  other v1: 164.325,116.575
PA11: CN3.15 JP10.3 SB16.2 U1.2 | length 65.2
  Top Layer w0.15: v4@160.975,134.92 164.17,134.92 165.15,135.9 168.175,135.9 v1(168.2,135.925) ; v1(171.275,135.925) 171.6,135.6 171.6,128.2 171.784,128.016 CN3.15@172.725,128.016
  Top Layer w0.27: U1.2@141.727,121.631 141.727,122.202 142.425,122.9 148.8,122.9 ccw(c148.8,123.443) 149.184,123.059 151.425,125.3 ; 151.425,125.3 cw(c151.787,124.938) 151.787,125.45 v1@153.625,125.45 ; v1@153.65,125.475 154.1,125.925 SB16.2@154.395,125.925
  Bottom Layer w0.15: v1(153.6,125.525) 154.075,125.525 158.6,130.05 158.6,134.6 158.92,134.92 v4(160.95,134.92) 160.95,137.75 160.225,138.475 160.225,141.708 159.925,142.008 159.925,144.25 160.075,144.4 161.85,144.4 162.25,144.8 162.25,147.95 161.97,148.23 JP10.3@161,148.23 ; v1(168.2,135.925) v1(171.275,135.925)
PA12: CN3.14 JP9.1 SB15.2 U1.1 | length 49.9
  Top Layer w0.127: v1(159.075,135.75) 159.075,133.95 v1(159.1,133.925)
  Top Layer w0.27: U1.1@142.527,121.631 142.527,122.43 142.6,122.503 149.045,122.503 ccw(c149.045,123.005) 149.4,122.65 151.646,124.896 ; 151.646,124.896 cw(c152.025,124.517) 152.025,125.053 153.736,125.053 154.093,124.697 SB15.2@154.262,124.697
  VCC w0.127: v1(159.1,133.925) 162.525,133.925 165.894,130.556 CN3.14@172.725,130.556
  Bottom Layer w0.127: v1(153.725,124.975) 154.1,124.975 159.1,129.975 v1(159.1,133.925) ; JP9.1@157.75,143.15 157.75,141.225 158.725,140.25 158.725,136.1 v1(159.075,135.75)
PA13: CN2.9 SB24.1 U1.41 | length 100
  Top Layer w0.127: v1(113.625,130.125) 115.875,130.125 116.5,129.5 v1@124.875,129.5 ; v1(124.925,117.3) 129.7,117.3 130.76,116.24 130.76,115.04 v1(130.95,114.85) ; U1.41@143.227,114.881 144.619,114.881 v1(145.275,114.225)
  Bottom Layer w0.127: CN2.9@111.76,143.256 113.381,143.256 113.775,143.65 113.775,152.725 114.275,153.225 125.45,153.225 126.125,153.9 126.125,156.275 125.875,156.525 125.875,161.725 125.425,162.175 125.425,167.049 125.762,167.386 SB24.1@125.959,167.386 ; 113.419,143.256 113.625,143.05 v1(113.625,130.125) ; v1@124.925,117.4 v1(124.925,129.5) ; v1(130.95,114.85) 131.313,114.487 133.237,114.487 133.571,114.821 142.479,114.821 143.075,114.225 v1(145.275,114.225)
PA14: CN2.10 SB40.1 U1.42 | length 107.1
  Top Layer w0.127: v1(113.475,128.8) 115.675,128.8 115.95,129.075 123.775,129.075 v1@123.975,128.875 ; v1(124.025,117.65) 124.069,117.694 130.126,117.694 131.17,116.65 v1(131.17,116.09) ; U1.42@143.227,115.681 v1(144.4,115.681)
  Bottom Layer w0.127: v1(113.475,128.8) 113.075,129.2 113.075,140.375 112.734,140.716 CN2.10@111.76,140.716 110.734,140.716 110.225,141.225 110.225,151.725 110.7,152.2 112.25,152.2 113.862,153.812 124.489,153.812 124.727,154.05 124.727,154.722 124.723,154.725 124.723,159.597 124.727,159.6 124.727,160.261 124.35,160.638 124.35,164.45 124.275,164.525 124.275,172.15 124.591,172.466 SB40.1@125.959,172.466 ; v1(124.025,117.65) v1(124.025,128.875) ; v1@131.17,116.087 133.312,116.087 133.7,116.475 133.7,116.825 134.173,117.298 141.977,117.298 142.675,116.6 142.675,116.233 143.227,115.681 v1(144.4,115.681)
PB2: CN3.17 CN5.7 SB31.1 U1.37 | length 109.7
  Top Layer w0.127: U1.37@143.227,111.681 v1(144.369,111.681)
  Top Layer w0.15: v3(164.775,125.8) 163.975,125.8 163.4,125.225 163.4,115.9 163.984,115.316 CN5.7@166.624,115.316
  VCC w0.127: v3@145.62,126.325 154.925,126.325 155.45,125.8 v3(164.775,125.8) 168.1,125.8 170.964,122.936 CN3.17@172.725,122.936
  Bottom Layer w0.127: SB31.1@133.768,150.172 133.515,150.425 133.131,150.425 132.675,149.969 132.675,148.925 133.825,147.775 146.306,147.775 146.939,147.142 146.939,141.859 146.57,141.49 145.17,141.49 143.11,139.43 143.11,136.73 145.59,134.25 v3@145.59,126.34 ; v1(144.369,111.681) 145.031,111.681 145.98,112.63 162.771,112.63 162.86,112.54 164.04,112.54 166.624,115.124 CN5.7@166.624,115.316
  other v3: 145.62,126.34
PB5: CN3.20 CN5.5 SB32.1 U1.40 | length 39.5
  Top Layer w0.127: U1.40@143.227,114.081 144.569,114.081 146.356,112.294 146.356,110.569 147.45,109.475 v1(147.45,108.575) 147.45,107.725 147.672,107.503
  Top Layer w0.3: 147.672,107.503 148.056,107.119 SB32.1@148.764,107.119 ; CN5.5@166.624,110.236 168.786,110.236 169.375,110.825 169.375,112.1 172.34,115.065 CN3.20@172.725,115.065
  Bottom Layer w0.127: v1(147.45,108.575) 160.05,108.575 160.675,109.2 160.675,109.725 161.186,110.236 CN5.5@166.624,110.236
PB6: CN1.3 CN3.11 SB33.1 U1.39 | length 65.7
  Top Layer w0.127: U1.39@143.227,113.281 144.969,113.281 145.9,112.35 v1(145.9,111.75) 145.9,110.325 146.675,109.55 146.675,109.316 146.716,109.275 146.716,105.909 147.213,105.412 148.702,105.412 SB33.1@148.868,105.247
  Top Layer w0.15: v1(163.225,111.8) 163.225,114.175 162.82,114.58 162.82,126.745 163.075,127 CN1.3@166.624,127 169.9,127 170.3,127.4 170.3,137.65 170.826,138.176 CN3.11@172.725,138.176
  Bottom Layer w0.15: v1(145.9,111.75) 146.408,112.258 162.767,112.258 v1(163.225,111.8)